# EAGLE board Power_grad (EAGLE 9.5.2)
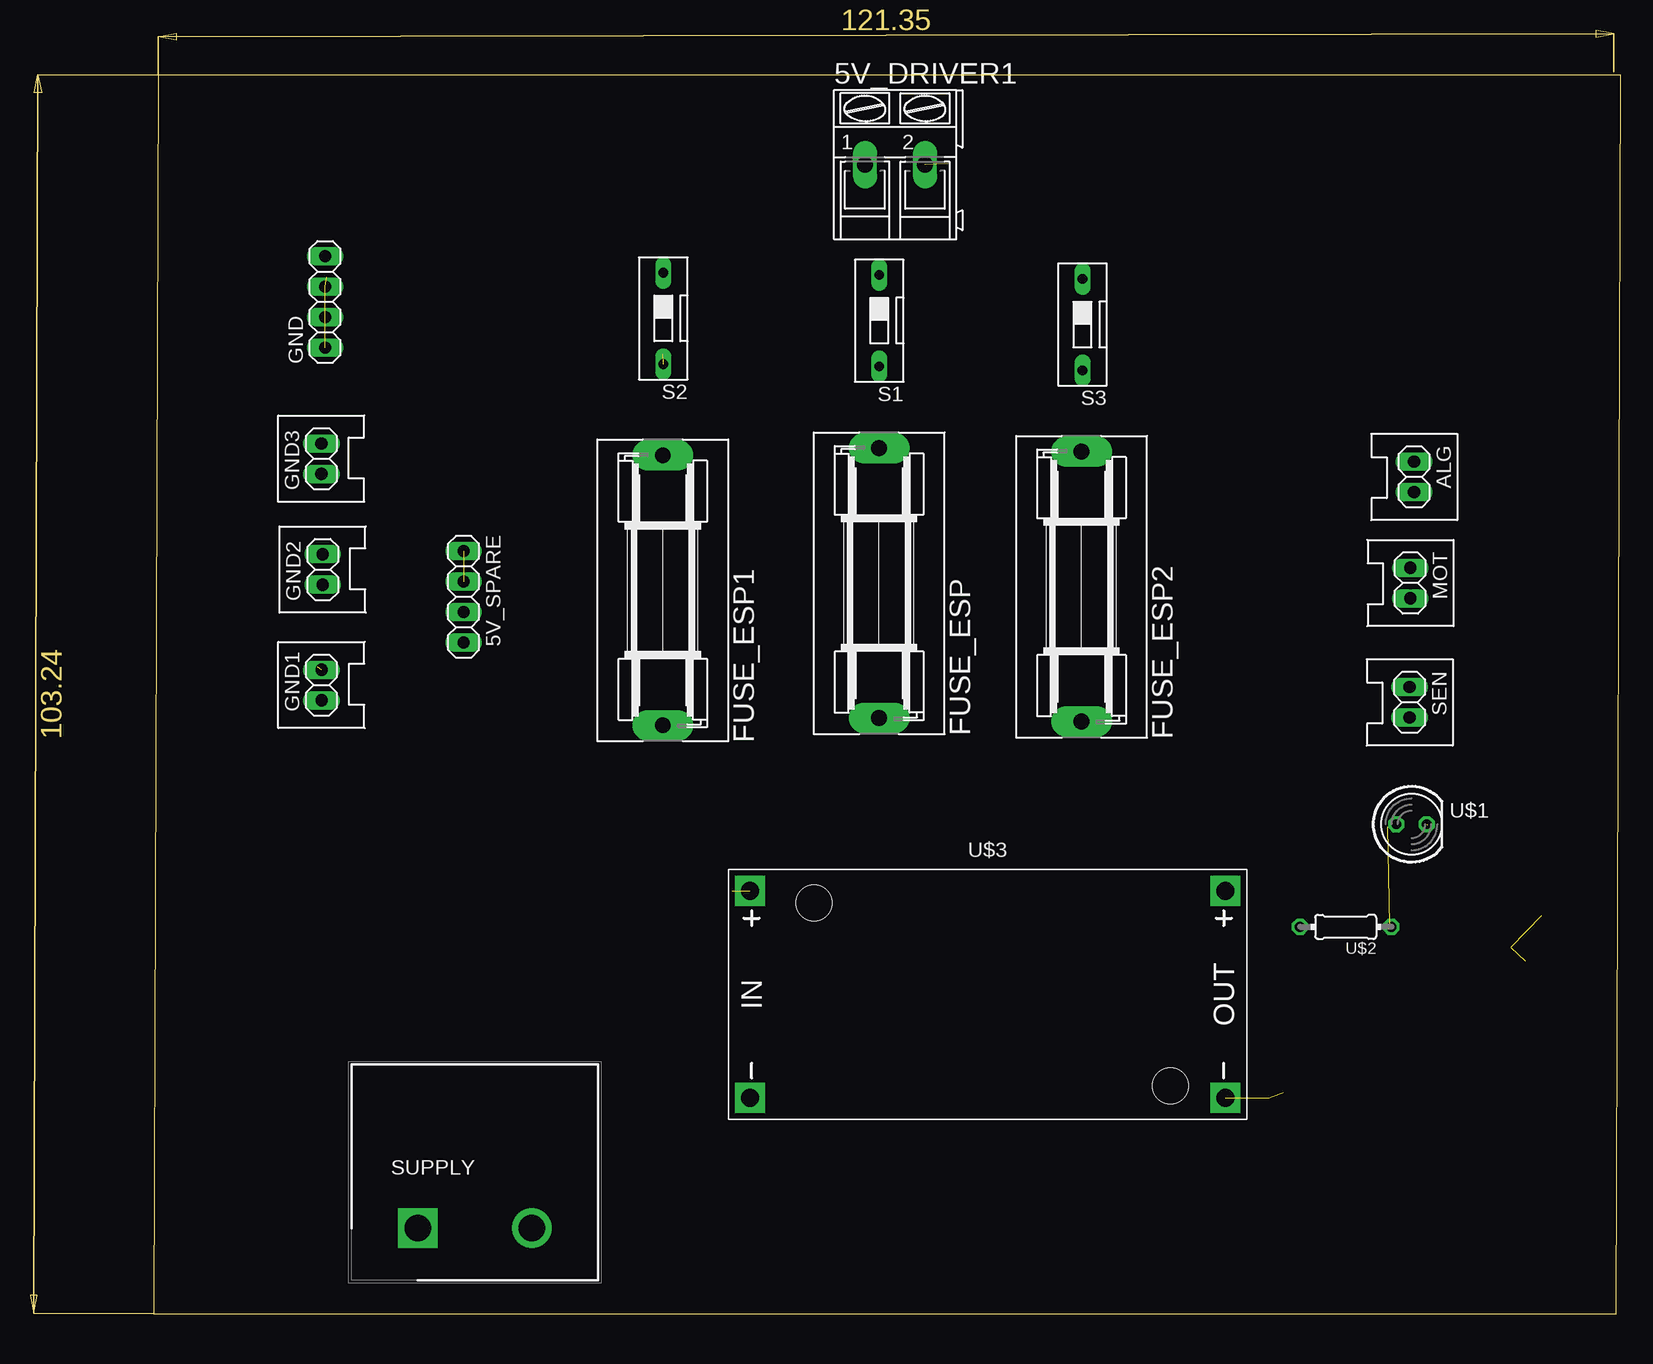
[diagram p0: board, top side]
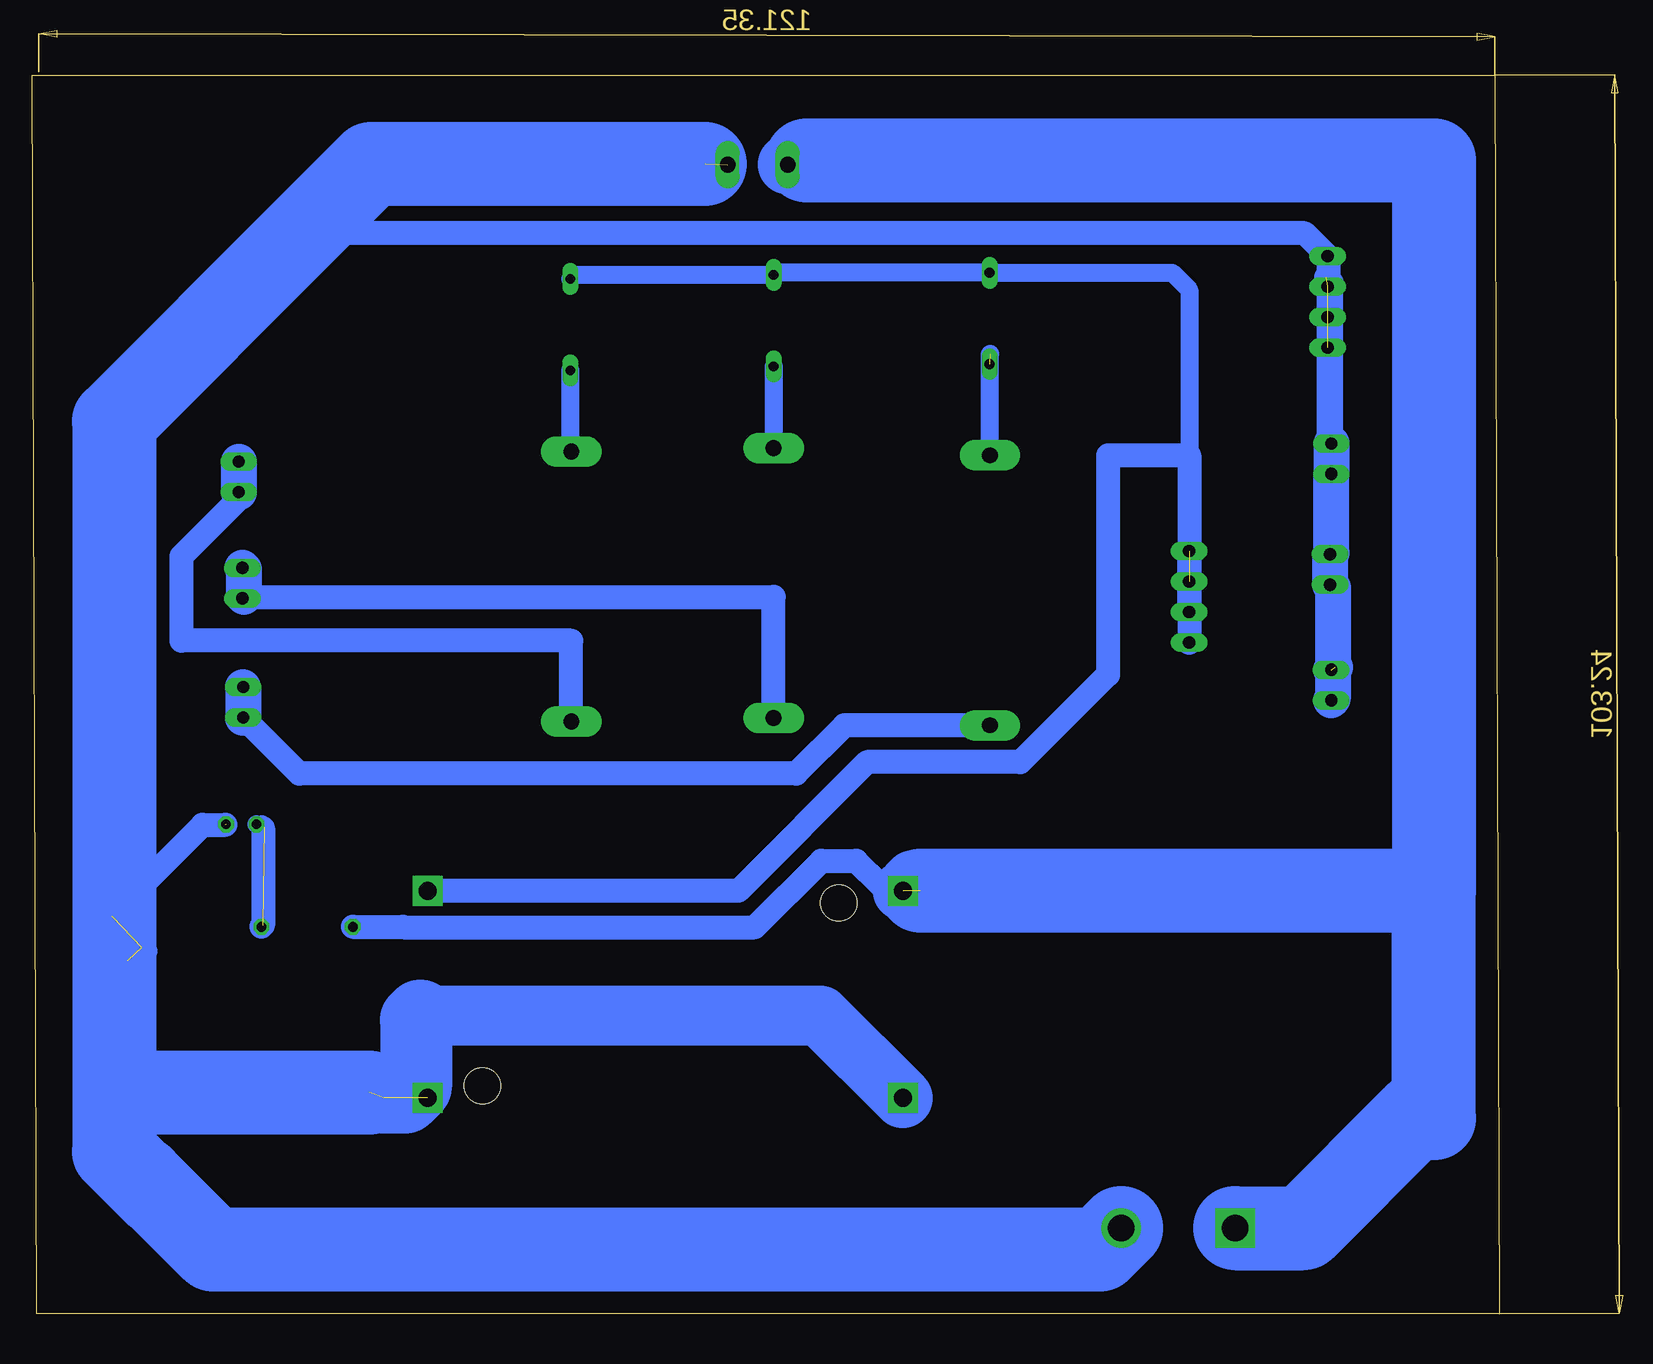
[diagram p1: board, bottom side, seen from below]

Size 122.28 x 103.24 mm. Coordinates in mm from the lower left corner, seen from the top.
Outline: 0,0 121.91,0 122.28,103.24 0.37,103.24 0,0
Copper layers (1*16): Top 0.035mm / dielectric 1.5mm / Bottom 0.035mm
Design rules "default *": minimum track width 6mil, minimum drill 0.35mm, track to track 0.8mm, track to pad 0.8mm, pad to pad 6mil, via to via 6mil, smd to smd 6mil, copper to edge 40mil, drill to drill 6mil, minimum pad ring 10mil, minimum via ring 8mil, stop-mask expansion 4mil, vias tented up to drill 0mil, thermal gap 10mil

## Footprints (pad centres in the part's own frame; a part is rotated, then mirrored left to right if it is on the bottom)
AK300/2 = drill 1.321 long: 1 -2.515,0; 2 2.489,0
1X04 = drill 1.016 long: 1 -3.81,0; 2 -1.27,0; 3 1.27,0; 4 3.81,0
1X02_DATA = drill 1.016 long: 1 -1.27,0; 2 1.27,0
SH22,5A = drill 1.321 pad 2.54 long: 1 -11.252,0; 2 11.252,0
DS-01 = drill 0.813 long: 1 0,-3.81; 2 0,3.81
SHDR2W140P0X950_1X2_2055X1800X = drill 2.2 pad 3.3 square: 1 0,0 | drill 2.2 pad 3.3: 2 9.5,0
LED5MM = drill 0.813 octagon: A -1.27,0; K 1.27,0
0204/7 = drill 0.813 octagon: 1 -3.81,0; 2 3.81,0
DC-DC-STEP-DOWN-LM2596 = drill 1.5 pad 2.5 square: IN+ -19.812,8.636; IN- -19.812,-8.636; OUT+ 19.812,8.636; OUT- 19.812,-8.636 | hole 3: -14.478,7.62; 15.24,-7.62

## Placement (x,y rotation side)
5V_DRIVER1  [AK300/2]  61.81,95.79 0 top
5V_SPARE  [1X04]  25.83,59.76 270 top
ALG  [1X02_DATA]  105.06,69.76 270 top
FUSE_ESP  [SH22,5A]  60.47,60.9 90 top
FUSE_ESP1  [SH22,5A]  42.44,60.31 90 top
FUSE_ESP2  [SH22,5A]  77.34,60.61 90 top
GND  [1X04]  14.29,84.35 90 top
GND1  [1X02_DATA]  13.99,52.41 90 top
GND2  [1X02_DATA]  14.09,62.04 90 top
GND3  [1X02_DATA]  13.98,71.28 90 top
MOT  [1X02_DATA]  104.75,60.91 270 top
S1  [DS-01]  60.48,82.78 180 top
S2  [DS-01]  42.48,82.97 180 top
S3  [DS-01]  77.42,82.46 180 top
SEN  [1X02_DATA]  104.69,50.97 270 top
SUPPLY  HB9500-9.5-2P  [SHDR2W140P0X950_1X2_2055X1800X]  22.01,7.13 0 top
U$1  LED5MM  [LED5MM]  104.85,40.8 0 top
U$2  RES-7  [0204/7]  99.36,32.25 180 top
U$3  DC-DC-STEP-DOWN-LM2596  [DC-DC-STEP-DOWN-LM2596]  69.52,26.62 0 top

## Library data of the parts
5V_DRIVER1 5V_SPARE ALG FUSE_ESP FUSE_ESP1 FUSE_ESP2 GND GND1-GND3 MOT SEN U$1-U$3 = ALL
S1-S3 = ALL; OC_FARNELL: unknown; OC_NEWARK: unknown
SUPPLY = HB9500-9.5-2P; DESCRIPTION: Barrier Block 2 2 0.374"(9.50mm) 12-22 AWG P=9.5mm Barrier Terminal Blocks; HEIGHT: 14.4mm; MANUFACTURER_NAME: Ningbo Kangnex; MANUFACTURER_PART_NUMBER: HB9500-9.5-2P

## Nets
5V: 5V_SPARE.1 5V_SPARE.2 5V_SPARE.3 5V_SPARE.4 S1.1 S2.1 S3.1 U$3.OUT+
12V: 5V_DRIVER1.1 SUPPLY.1 U$2.2 U$3.IN+
ALG: ALG.1 ALG.2 FUSE_ESP2.1
GND: 5V_DRIVER1.2 GND1.1 GND1.2 GND2.1 GND2.2 GND3.1 GND3.2 GND.1 GND.2 GND.3 GND.4 SUPPLY.2 U$1.K U$3.IN- U$3.OUT-
MOT: FUSE_ESP.1 MOT.1 MOT.2
N$1: U$1.A U$2.1
N$2: FUSE_ESP1.2 S2.2
N$3: FUSE_ESP.2 S1.2
N$4: FUSE_ESP2.2 S3.2
SEN: FUSE_ESP1.1 SEN.1 SEN.2

## Tracks (layer width: path | path; a pad name or v marks a point on that pad's centre or on a via)
5V  (1 unrouted)
  Bottom 1.5: 25.83,71.56 25.83,85.36 27.25,86.78 S2.1 60.29,86.78 S1.1 77.1,86.59 S3.1
  Bottom 2: 5V_SPARE.1 5V_SPARE.3 5V_SPARE.4 25.83,71.56 32.59,71.56 32.6,71.57 32.6,53.29 39.9,45.99 52.68,45.99 63.42,35.26 U$3.OUT+
12V  (1 unrouted)
  Bottom 2: U$2.2 91.37,32.25 91.33,32.21 62.05,32.21 56.5,37.76 53.59,37.76 51.63,35.8 49.17,35.8 | U$3.IN+ 43.02,35.26 42.48,35.8
  Bottom 5: 42.48,35.8 42.48,36.14 48.83,36.14 49.17,35.8 U$3.IN+ | 5V_DRIVER1.1 58.09,95.79 57.72,96.16
  Bottom 7: SUPPLY.1 16.31,7.13 7.13,16.31 | 7.13,16.31 5.43,16.31 5.43,35.26 | 5.61,17.83 6.49,16.95 7.13,16.31 | 57.72,96.16 5.43,96.16 5.43,35.26 | 5.43,35.26 48.23,35.26
ALG
  Bottom 2: FUSE_ESP2.1 77.34,56.11 109.83,56.11 109.83,63.15 105.06,67.92 ALG.2
  Bottom 3: ALG.1 ALG.2
GND  (10 unrouted)
  Bottom 2: GND3.2 14.23,72.8 14.23,88.1 GND.4 16.2,90.08 99.78,90.08 | 14.41,86.39 13.98,85.96 GND3.1 | 112.83,30.23 113.13,30.53 | 106.17,40.75 108.08,40.75 115.65,33.18 | 111.92,10.07 113.09,11.25 114.35,12.5 114.35,18.44 114.35,29.41
  Bottom 3: GND1.2 13.87,53.56 13.87,51.26 GND1.1 | GND3.2 GND3.1 13.98,63.42 GND2.2 GND2.1 13.85,60.53 13.85,54.1 13.66,53.91
  Bottom 5: 89.91,24.84 56.57,24.84 U$3.IN- | 112.02,10.07 111.92,10.07
  Bottom 6: 89.91,24.84 90.28,24.48 90.28,18.92 91.2,18 92.97,18
  Bottom 7: SUPPLY.2 33.31,5.33 107.18,5.33 113.09,11.25 | 66.2,95.85 94,95.85 99.78,90.08 115.46,74.39 115.46,13.51 112.02,10.07 | 114.35,18.44 94.19,18.44
MOT
  Bottom 2: FUSE_ESP.1 60.47,59.75 104.64,59.75 MOT.2
  Bottom 3: MOT.1 104.64,62.07 104.64,59.75
N$1  (1 unrouted)
  Bottom 1.5: U$1.A 103.12,40.8 102.88,40.56
  Bottom 2: 103.04,40.49 103.04,32.38 U$2.1
N$2  (1 unrouted)
  Bottom 1.5: FUSE_ESP1.2 42.44,79.98 42.42,80
N$3
  Bottom 1.5: S1.2 60.48,72.16 FUSE_ESP.2
N$4
  Bottom 1.5: S3.2 77.42,71.94 FUSE_ESP2.2
SEN
  Bottom 2: FUSE_ESP1.1 54.56,49.06 58.6,45.02 100.02,45.02 SEN.2
  Bottom 3: SEN.1 SEN.2